# Altium PCB LEDS RGB.PcbDoc
Units mm, origin at the board's own origin, x right, y up, seen from the top; angles counter-clockwise.
Board outline 152.4 x 101.6 mm, 2 copper layers (Top Layer, Bottom Layer); 29 components, 22 nets, 68 pads, 0 vias.
Unrouted connection lines stored in the file: 42.
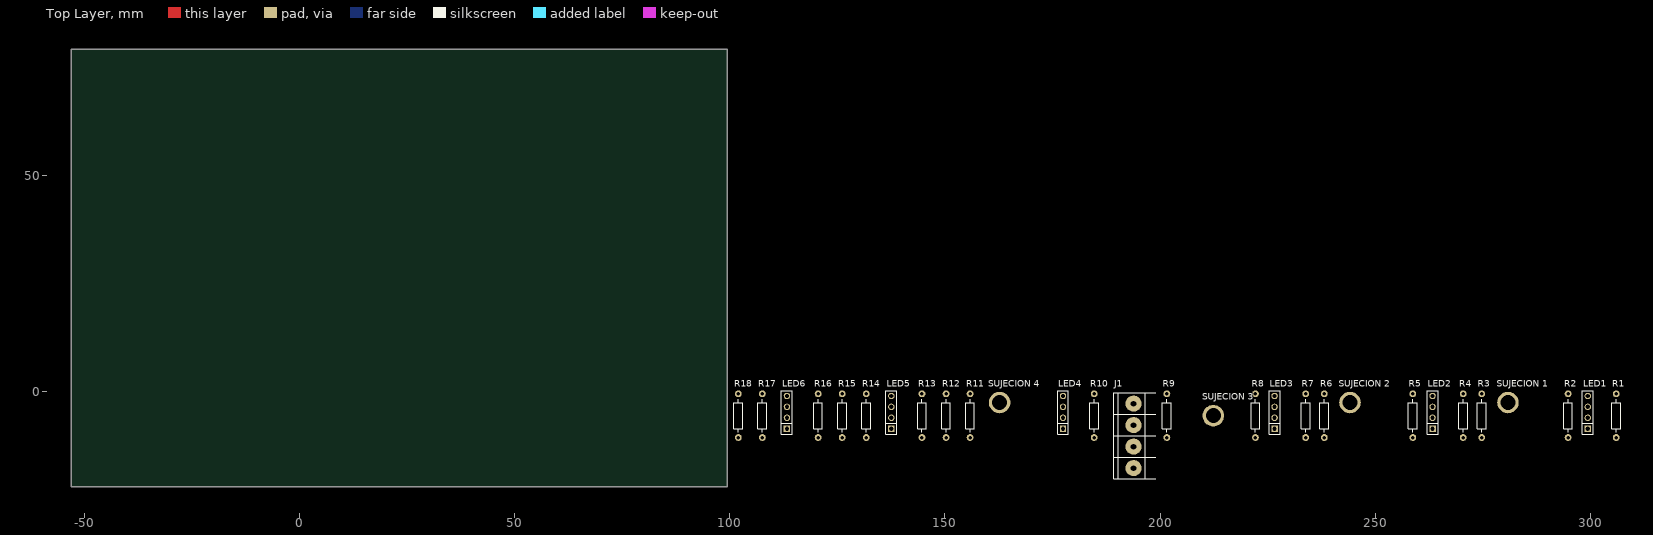
[diagram p0: Top Layer view]
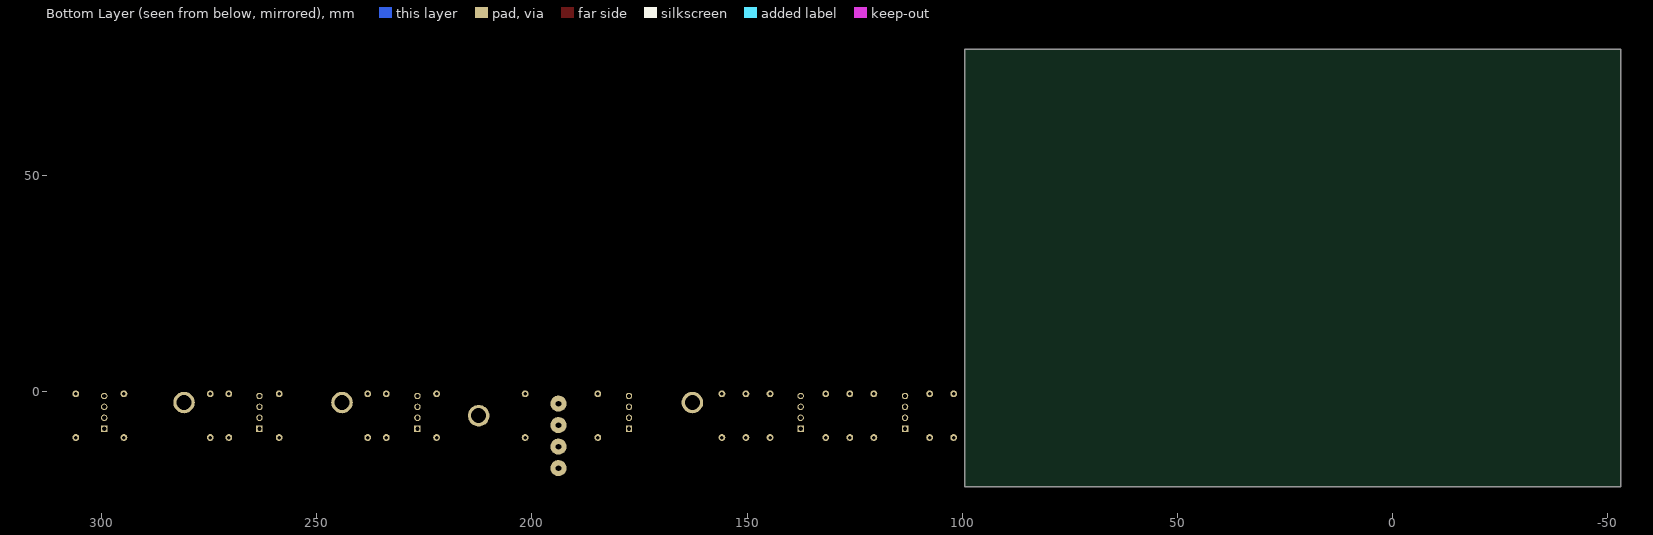
[diagram p1: Bottom Layer view, seen from below]

## Layer stack, top to bottom
Top Solder: solder mask 0.0102, Solder Resist, Dk 3.5
Top Layer: signal copper 0.0356
Dielectric 1: dielectric 0.32, FR-4, Dk 4.8
Bottom Layer: signal copper 0.0356
Bottom Solder: solder mask 0.0102, Solder Resist, Dk 3.5

## Board outline
-52.959,-22.225 99.441,-22.225 99.441,79.375 -52.959,79.375

## Design rules (kind name [scope] priority, off if disabled: settings)
Clearance [All] p1: gap=0.254
PolygonConnect [All] p1: connectstyle=Relief reliefconductorwidth=0.254 reliefentries=4 polygonreliefangle="90 Angle" airgapwidth=0.254
RoutingVias [All] p1: holewidth=0.711 width=1.27 viastyle="Through Hole" minholewidth=0.711 minwidth=1.27 maxholewidth=0.711 maxwidth=1.27
SolderMaskExpansion [All] p1: expansion=0.102
UnpouredPolygon [All] p1: allowunpoured=FALSE
Width [All] p1: maxlimit=0.9 minlimit=0.254 preferedwidth=0.8 toplayer_maxwidth=0.254 toplayer_prefwidth=0.254 bottomlayer_minwidth=0.7 minimp=50.000000 maximp=50.000000 favimp=50.000000
29 further rules are at their usual default settings.

## Components (designator, comment, footprint, x,y, rotation, side; value= is the part's Value field where it differs from the comment)
J1 "BORNERA 4" BORNERA4 193.802,-10.414 r0 top
LED1 "CON4" SIP4 299.339,-4.953 r90 top
LED2 "CON4" SIP4 263.271,-4.953 r90 top
LED3 "CON4" SIP4 226.568,-4.953 r90 top
LED4 "CON4" SIP4 177.419,-4.953 r90 top
LED5 "CON4" SIP4 137.541,-4.953 r90 top
LED6 "CON4" SIP4 113.284,-4.953 r90 top
R1 "RES" RES400 305.943,-10.795 r90 top
R2 "RES" RES400 294.767,-10.795 r90 top
R3 "RES" RES400 274.701,-10.795 r90 top
R4 "RES" RES400 270.383,-10.795 r90 top
R5 "RES" RES400 258.699,-10.795 r90 top
R6 "RES" RES400 238.125,-10.795 r90 top
R7 "RES" RES400 233.807,-10.795 r90 top
R8 "RES" RES400 222.123,-10.795 r90 top
R9 "RES" RES400 201.549,-10.795 r90 top
R10 "RES" RES400 184.658,-10.795 r90 top
R11 "R12" RES400 155.829,-10.795 r90 top
R12 "RES" RES400 150.241,-10.795 r90 top
R13 "RES" RES400 144.653,-10.795 r90 top
R14 "RES" RES400 131.699,-10.795 r90 top
R15 "RES" RES400 126.111,-10.795 r90 top
R16 "RES" RES400 120.523,-10.795 r90 top
R17 "RES" RES400 107.569,-10.795 r90 top
R18 "RES" RES400 101.981,-10.795 r90 top
"SUJECION 1" "SUJECION" "SUJECION (5.00MM - 3.50MM)" 280.797,-2.667 r90 top
"SUJECION 2" "SUJECION" "SUJECION (5.00MM - 3.50MM)" 244.094,-2.667 r90 top
"SUJECION 3" "SUJECION" "SUJECION (5.00MM - 3.50MM)" 212.344,-5.715 r90 top
"SUJECION 4" "SUJECION" "SUJECION (5.00MM - 3.50MM)" 162.687,-2.667 r90 top

## Footprints (in the part's own frame and the unit in brackets; to place one, negate y for a bottom-side part, rotate by r counter-clockwise, add the part's x,y. Pads: shape width x height; smd on the part's side, far side on the other; paste and mask are expansions set on the pad)
BORNERA4 [mm] "Bornera con Tornillos 5mm separación"
  round 3.75 hole 1.3: 1(0,7.5) 2(0,2.5) 3(0,-2.5) 4(0,-7.5)
  silkscreen extent -4.6,-10 5.2,10, body extent -3.76,-9.89 3.94,10.61, height 10
RES400 [mil]
  round 62 hole 32: 1(0,0) 2(400,0)
  silkscreen extent 50,-40 350,40, body extent -12,-45 412,46, height 96
SIP4 [mm]
  rect 1.5x1.5 hole 1.016: 1(-3.81,0)
  round 1.5 hole 1.016: 2(-1.27,0) 3(1.27,0) 4(3.81,0)
  silkscreen extent -5.08,-1.27 5.08,1.27, body extent -5.08,-1.27 5.08,1.27, height 8.38
"SUJECION (5.00MM - 3.50MM)" [mm]
  round 5 hole 3.5: 1(0,0)

## Part data
R11: library part RES

## Nets (pads, with @x,y where several pads share a name; then routed paths per layer and width w, separated by ;. In a path a pad name is that pad's centre, name@x,y a point inside that pad or via, vN(x,y) a via of type N, cw(c..) or ccw(c..) an arc to the next point about the centre after c; other vN are vias at no path point)
AZUL: J1.3 R2.1 R5.1 R8.1 R11.1 R14.1 R17.1
NetLED1_1: LED1.1 R1.2
NetLED1_2: LED1.2 R2.2
NetLED1_4: LED1.4 R3.2
NetLED2_1: LED2.1 R4.2
NetLED2_2: LED2.2 R5.2
NetLED2_4: LED2.4 R6.2
NetLED3_1: LED3.1 R7.2
NetLED3_2: LED3.2 R8.2
NetLED3_4: LED3.4 R9.2
NetLED4_1: LED4.1 R10.2
NetLED4_2: LED4.2 R11.2
NetLED4_4: LED4.4 R12.2
NetLED5_1: LED5.1 R13.2
NetLED5_2: LED5.2 R14.2
NetLED5_4: LED5.4 R15.2
NetLED6_1: LED6.1 R16.2
NetLED6_2: LED6.2 R17.2
NetLED6_4: LED6.4 R18.2
ROJO: J1.2 R3.1 R6.1 R9.1 R12.1 R15.1 R18.1
VCC: J1.1 LED1.3 LED2.3 LED3.3 LED4.3 LED5.3 LED6.3
VERDE: J1.4 R1.1 R4.1 R7.1 R10.1 R13.1 R16.1
pads on no net: "SUJECION 1.1" "SUJECION 2.1" "SUJECION 3.1" "SUJECION 4.1"